# Altium PCB BUCK_PCB.PcbDoc
Units mil, origin at the board's own origin, x right, y up, seen from the top; angles counter-clockwise.
Board outline 1950 x 1909.87 mil, 2 copper layers (Top Layer, Bottom Layer); 12 components, 6 nets, 34 pads, 0 vias.
Unrouted connection lines stored in the file: 2.
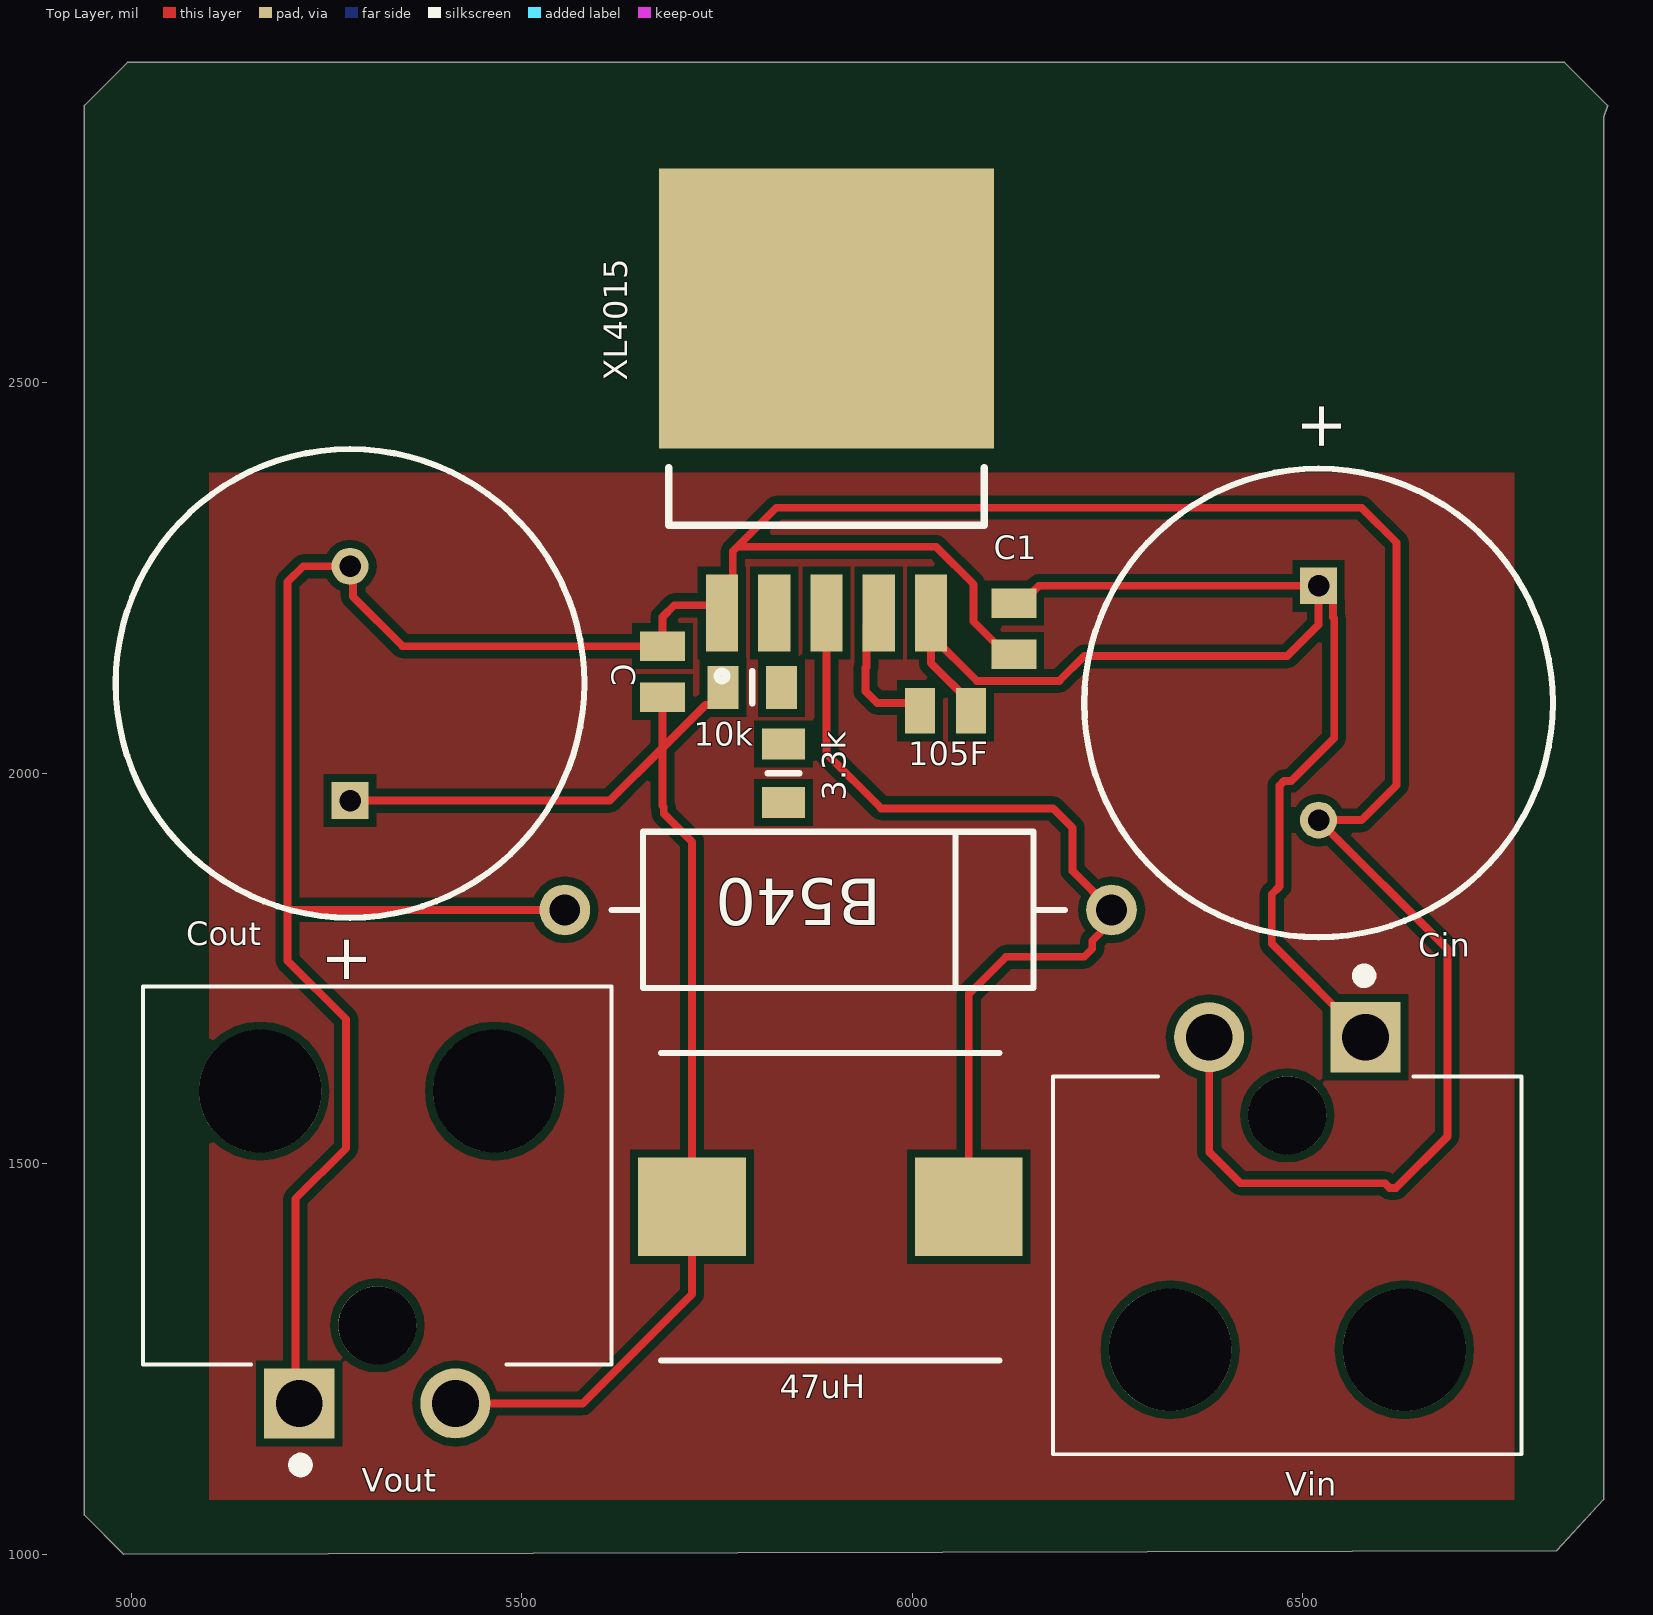
[diagram p0: Top Layer view]
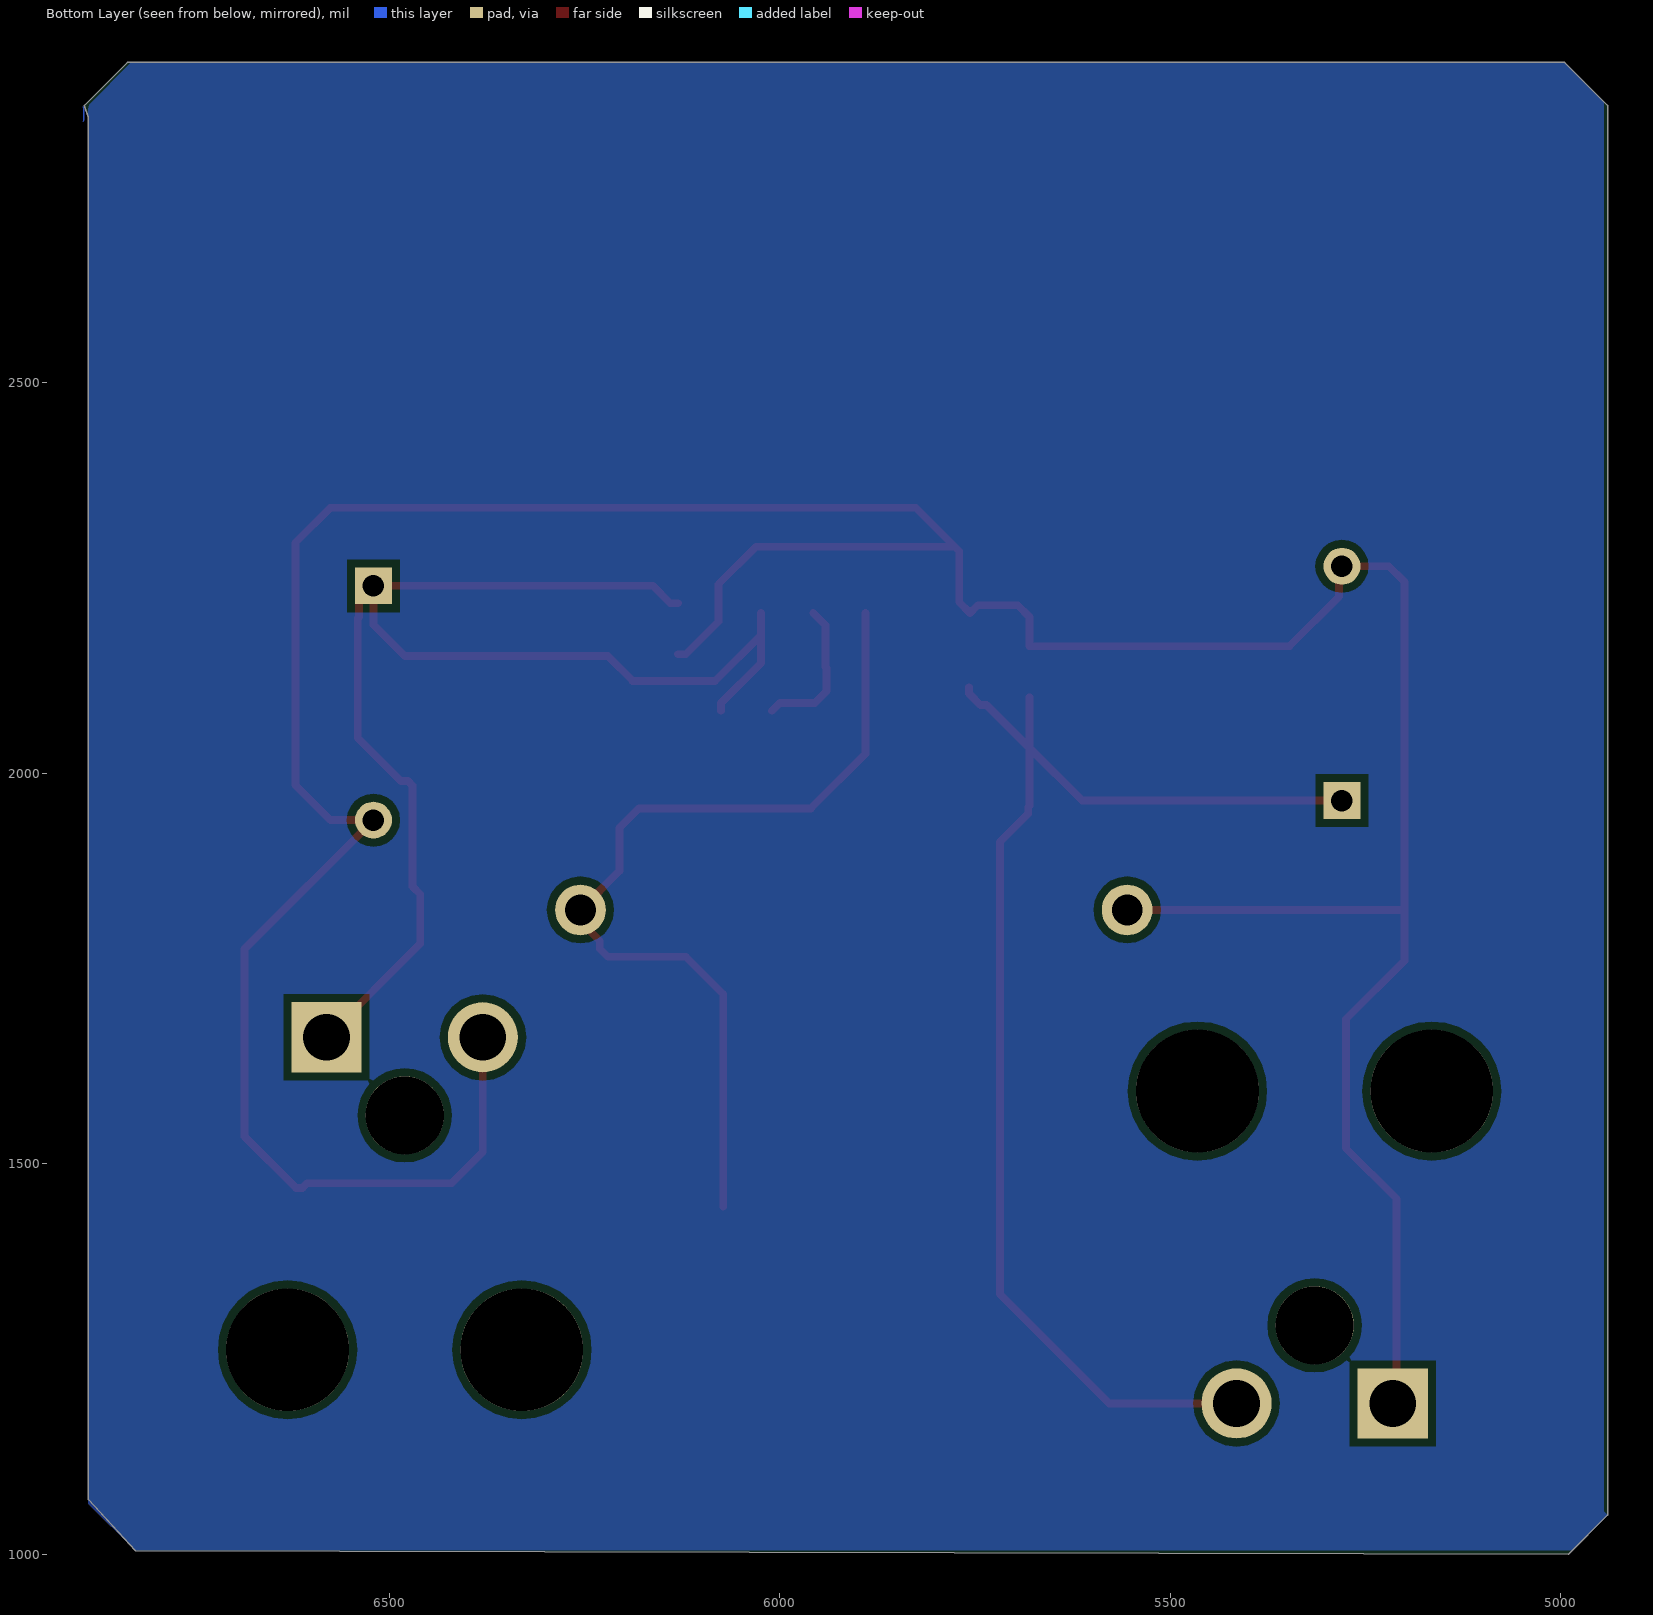
[diagram p1: Bottom Layer view, seen from below]
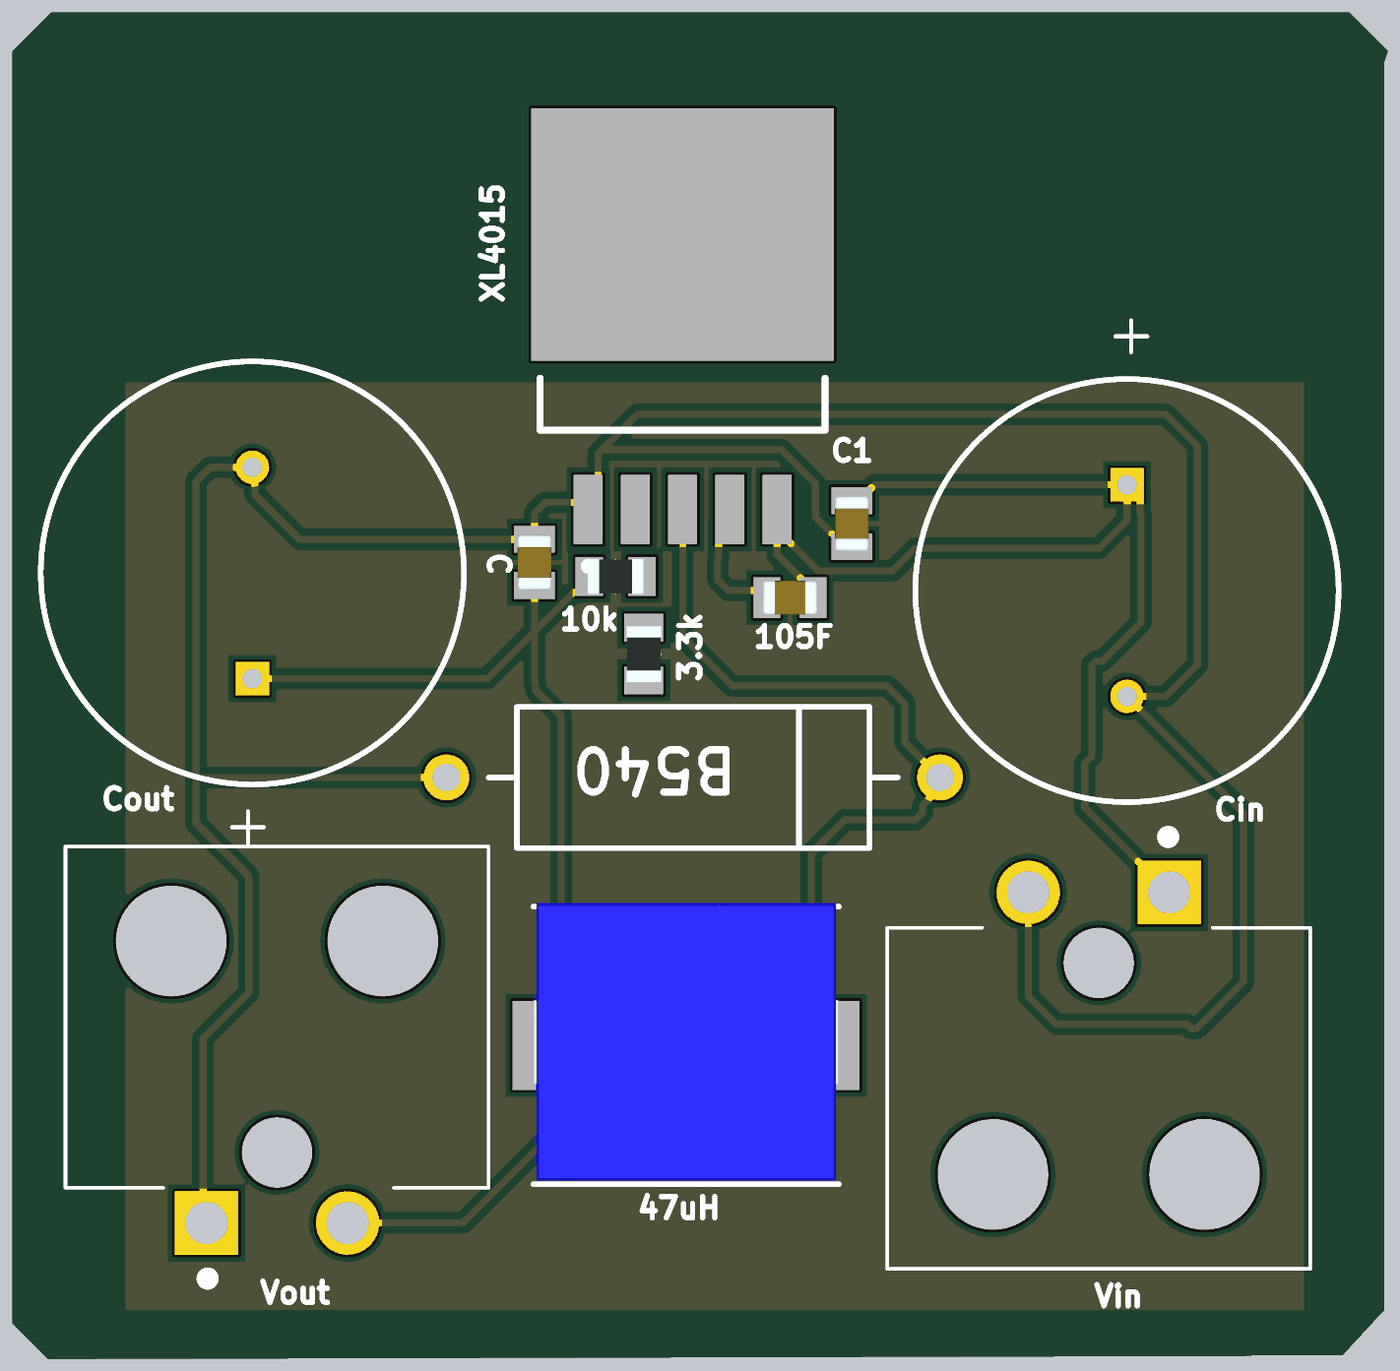
[diagram p2: 3D render of the assembled board from above, using the file's embedded part models]

## Layer stack, top to bottom
Top Solder: solder mask 0.4, Solder Resist, Dk 3.5
Top Layer: signal copper 1.4
Dielectric 1: dielectric 12.6, FR-4, Dk 4.8
Bottom Layer: signal copper 1.4
Bottom Solder: solder mask 0.4, Solder Resist, Dk 3.5

## Board outline
4990,1000.13 4940,1050.13 4940,1060 4940,2850 4940,2855 4995,2910 6835,2910 6890,2855 6885,2840 6885,1070 6825.01,1004.85

## Design rules (kind name [scope] priority, off if disabled: settings)
Clearance [All] p1: gap=10 ignorepadtopadclearanceinfootprint=FALSE except(0: Arc-Hole Track-Hole SMDPad-Hole THPad-Hole Via-Hole Fill-Hole Poly-Hole Region-Hole Text-Hole)
PolygonConnect [All] p1: connectstyle=Relief reliefconductorwidth=10 reliefentries=4 polygonreliefangle="90 Angle" airgapwidth=10
RoomDefinition BUCK_shematics [InComponentClass('BUCK_shematics')] p1: confinementstyle=ConfineIn formatcopy=TRUE lockcomponents=FALSE outline 0,0 2000,0 2000,1000 0,1000
RoutingVias [All] p1: holewidth=28 width=50 viastyle="Through Hole" minholewidth=28 minwidth=50 maxholewidth=28 maxwidth=50
SolderMaskExpansion [All] p1: expansion=4 istentingtop=FALSE
Width [All] p1: maxlimit=10 minlimit=10 preferedwidth=10
30 further rules are at their usual default settings.

## Components (designator, comment, footprint, x,y, rotation, side; value= is the part's Value field where it differs from the comment)
3.3k "" RESC2012X65N#1 5835,2000 r90 top
10k "" RESC2012X65N#2 5795,2110 r180 top
47uH "L1" INDPM110100X400N 5895,1445 r180 top
105F "CC" CAPC2012X145N 6042.32,2080 r0 top
B540 "D Zener" DIODE-0.7 5905,1825 r0 top
C "105F" CAPC2012X145N 5680,2130 r270 top
C1 "105F" CAPC2012X145N 6130,2185 r90 top
Cin "200uF" RB7.6-15 6520,2090 r90 top
Cout "Cin" RB7.6-15 5280,2115 r270 top (schematic designator C?)
Vin "" TE_794120-1 6480,1370 r180 top
Vout "794120-1" TE_794120-1 5315,1485 r0 top
XL4015 "" TO-263-5 5890,2677.68 r0 top

## Footprints (in the part's own frame and the unit in brackets; to place one, negate y for a bottom-side part, rotate by r counter-clockwise, add the part's x,y. Pads: shape width x height; smd on the part's side, far side on the other; paste and mask are expansions set on the pad)
CAPC2012X145N [mm]
  rect 0.97x1.47 smd: 1(-0.83,0) 2(0.83,0)
  body extent -1,-0.63 1,0.62, height 1.45
DIODE-0.7 [mm] "Diode, Thru-Hole; 2 Leads; 0.7 in Pin Spacing"
  round 1.65 hole 1: 1(-8.89,0) 2(8.89,0)
  silkscreen extent -7.37,-2.54 7.37,2.54
INDPM110100X400N [mm]
  rect 3.5x3.2 smd: 1(-4.5,0) 2(4.5,0)
  silkscreen extent -5.5,-5 5.5,5, body extent -5.5,-5.13 5.5,4.87, height 4
RB7.6-15 [mm] "Polarized Capacitor (Radial); 2 Leads"
  rect 1.2x1.2 hole 0.7: 1(3.81,0)
  round 1.2 hole 0.7: 2(-3.81,0)
  silkscreen extent -7.62,-7.62 7.62,7.62
RESC2012X65N#1 [mm]
  rect 1x1.4 smd: 2(0.95,0) H(-0.95,0)
  silkscreen extent 0,-0.53 0,0.53, body extent -1,-0.62 1,0.62, height 0.65
RESC2012X65N#2 [mm]
  rect 1x1.4 smd: 1(-0.95,0) 2(0.95,0)
  silkscreen extent 0,-0.53 0,0.53, body extent -1,-0.62 1,0.62, height 0.65
TE_794120-1 [mm]
  rect 2.28x2.28 hole 1.52: 1(-2.54,-7.415)
  round 2.28 hole 1.52: 2(2.54,-7.415)
  round 3.99 hole 3.99 unplated: ""(-3.81,2.745) ""(3.81,2.745)
  round 2.54 hole 2.54 unplated: ""(0,-4.875)
  silkscreen extent -7.62,-9.61 7.62,6.14
TO-263-5 [mm]
  rect 1.05x2.5 smd: 1(-3.4,-12) 2(-1.7,-12) 3(0,-12) 4(1.7,-12) 5(3.4,-12)
  rect 10.9x9.1 smd: 6(0,-2.1)
  silkscreen extent -5.13,-14.19 5.13,-7.28

## Part data
3.3k 10k: library part KTR10EZPF5103, "Thick Film Resistors - SMD 0805 510Kohm 1% High VoltageAEC-Q200", Manufacturer_Name="ROHM Semiconductor", Arrow Part Number=KTR10EZPF5103, Arrow Price/Stock=https://www.arrow.com/en/products/ktr10ezpf5103/rohm-semiconductor, Datasheet Link=http://rohmfs.rohm.com/en/products/databook/datasheet/passive/resistor/chip_resistor/ktr.pdf, Geometry.Height=0.65mm, Manufacturer_Part_Number=KTR10EZPF5103
47uH: library part SRP1038A-470M, "Inductor SMD shielded AEC-Q200 47uH Bourns SRP1038A Series Shielded Wire-wound SMD Inductor with a Carbonyl Powder Core, 47 H 20% 3A Idc", Manufacturer_Name=Bourns, RS Part Number=1728637, Allied Price/Stock=https://www.alliedelec.com/bourns-srp1038a-470m/70377524/, Allied_Number=70377524, Arrow Part Number=SRP1038A-470M, Arrow Price/Stock=https://www.arrow.com/en/products/srp1038a-470m/bourns, Datasheet Link=http://uk.rs-online.com/web/p/products/8193337, Geometry.Height=4mm, Manufacturer_Part_Number=SRP1038A-470M, RS Price/Stock=http://uk.rs-online.com/web/p/products/1728637
105F C C1: library part GRM21BR71H104JA01L, "Multilayer Ceramic Capacitors MLCC - SMD/SMT 0805 0.1uF 50volts X7R 5%", Manufacturer_Name="Murata Electronics", Arrow Part Number=GRM21BR71H104JA01L, Arrow Price/Stock=https://www.arrow.com/en/products/grm21br71h104ja01l/murata-manufacturing, Datasheet Link=http://www.murata.com/~/media/webrenewal/support/library/catalog/products/capacitor/mlcc/c02e.pdf, Geometry.Height=1.45mm, Manufacturer_Part_Number=GRM21BR71H104JA01L
B540: "Zener Diode", LatestRevisionDate=17-Jul-2002, LatestRevisionNote="Re-released for DXP Platform.", PackageDescription="Diode, Thru-Hole; 2 Leads; 0.7 in Pin Spacing", PackageReference=DIODE-0.7, Published=8-Jun-2000, Publisher="Altium Limited"
Cin Cout: library part "Cap Pol1", "Polarized Capacitor (Radial)", LatestRevisionDate=17-Jul-2002, LatestRevisionNote="Re-released for DXP Platform.", PackageDescription="Polarized Capacitor (Radial); 2 Leads", PackageReference=RB7.6-15, Published=8-Jun-2000, Publisher="Altium Limited"
  Cin: Cin=220pF
  Cout: Cout=300pF
Vin: library part 794120-1, "Conn Power HDR 2 POS 5.08mm Solder RA Thru-Hole 2 Terminal 1 Port Automotive Bag", Package=None, Availability=Unavailable, MF="TE Connectivity", MP=794120-1, Price=None, SnapEDA_Link=https://www.snapeda.com/parts/794120-1/TE%20Connectivity%20AMP%20Connectors/view-part/2777094/?ref=snap
Vout: "Conn Power HDR 2 POS 5.08mm Solder RA Thru-Hole 2 Terminal 1 Port Automotive Bag", Package=None, Availability=Unavailable, MF="TE Connectivity", MP=794120-1, Price=None, SnapEDA_Link=https://www.snapeda.com/parts/794120-1/TE%20Connectivity%20AMP%20Connectors/view-part/2777094/?ref=snap
XL4015: library part AP1506-50K5G-13, "DC / DC converters in the housing TO263-5L, Voltage Regulator, Buck Converter, Switching Regulator", Manufacturer_Name="Diodes Inc.", Arrow Part Number=AP1506-50K5G-13, Arrow Price/Stock=https://www.arrow.com/en/products/ap1506-50k5g-13/diodes-incorporated, Datasheet Link=https://www.diodes.com/assets/Datasheets/AP1506.pdf, Manufacturer_Part_Number=AP1506-50K5G-13

## Nets (pads, with @x,y where several pads share a name; then routed paths per layer and width w, separated by ;. In a path a pad name is that pad's centre, name@x,y a point inside that pad or via, vN(x,y) a via of type N, cw(c..) or ccw(c..) an arc to the next point about the centre after c; other vN are vias at no path point)
GND: B540.1 C1.1 C.1 Cin.2 Cout.2 Vin.2 Vout.1 XL4015.1 | length 4957.6
  Top Layer w10: Vout.1 5210,1198.07 5210,1455 5275,1520 5275,1685 5200,1760 5200,1825 ; B540.1 5200,1825 ; C1.1 6120.16,2152.32 6078.4,2194.08 6078.4,2241.79 6030.19,2290 5775.86,2290 ; Vin.2 6380,1515 6420,1475 6605,1475 6610.86,1469.14 6619.14,1469.14 6685,1535 6685,1775 Cin.2 6575,1940 6620,1985 6620,2295 6575,2340 5825.86,2340 5775.86,2290 ; 5200,1825 5200,2245 5220,2265 Cout.2 5283.62,2261.38 5283.62,2226.38 5347.32,2162.68 C.1 5680,2200 5695,2215 5746.38,2215 XL4015.1 5770,2219.09 5770,2284.14 5775.86,2290
Net3.3k_2: 3.3k.2 10k.1 XL4015.2
Net10k_2: 10k.2 47uH.2 C.2 Cout.1 Vout.2 | length 1683.2
  Top Layer w10: Cout.1 5612.6,1965 5680,2032.4 ; Vout.2 5578.07,1193.07 5717.83,1332.83 47uH.2 5717.83,1912.17 5681.64,1948.36 5681.64,1956.64 5680,1958.28 5680,2032.4 ; C.2 5680,2032.4 ; 10k.2 5757.6,2102.13 5742.91,2087.44 5735.04,2087.44 5680,2032.4
Net47uH_1: 47uH.1 B540.2 XL4015.3 | length 1174.6
  Top Layer w10: XL4015.3 5890,2025 5960,1955 6180,1955 6205,1930 6205,1875 B540.2 6255,1810.13 6230.34,1785.47 6230.34,1775.34 6220,1765 6120,1765 6072.17,1717.17 47uH.1
Net105F_1: 105F.1 XL4015.4 | length 187.2
  Top Layer w10: XL4015.4 5941.26,2189.57 5941.26,2136.14 5940,2134.88 5940,2105 5955,2090 5999.65,2090 105F.1
Net105F_2: 105F.2 C1.2 Cin.1 Vin.1 XL4015.5 | length 1820.3
  Top Layer w10: XL4015.5 XL4015.5@6023.86,2176.69 ; 105F.2 6075,2089.84 6023.86,2140.98 XL4015.5@6023.86,2176.69 ; C1.2 6139.84,2217.68 6162.17,2240 Cin.1 ; Vin.1 6460,1781.93 6460,1845 6470,1855 6470,1984.14 6475.86,1990 6485,1990 6540,2045 6540,2198.28 6538.62,2199.66 6538.62,2221.38 Cin.1 ; XL4015.5@6023.86,2176.69 6082.32,2118.23 6188.23,2118.23 6220,2150 6480,2150 6520,2190 Cin.1
pads on no net: 3.3k.H Vin. Vout. XL4015.6

## Polygon pours and split planes (outlines as drawn)
no net on Top Layer "NONET_L01_P008" (solid, pour order 8): 6770.82,2385 5100,2385 5100,1070 6770.82,1070
no net on Top Layer "NONET_L01_P007" (solid, pour order 7): 5945,2410
no net on Bottom Layer "NONET_L02_P011" (solid, pour order 11): 6890,2855
no net on Bottom Layer "NONET_L02_P010" (solid, pour order 10): 6891.83,2853.17 6891.83,2834.66 6890,2836.49 6890,2850
no net on Bottom Layer "NONET_L02_P009" (solid, pour order 9): 6890,2850 6830,2910 4995,2910 4945,2860 4945,1055 4940,1050 4985,1005 6825,1005 6885,1065 6885,2850 6890,2855 6891.83,2853.17 6891.83,2834.66
no net on Layer0 "Default Coverlay 2 Top" (split plane): 1000,1000 7000,1000 7000,5000 1000,5000
no net on Layer0 "Default Coverlay 2 Bottom" (split plane): 1000,1000 7000,1000 7000,5000 1000,5000

## Text inside footprints (layer, text, board x,y; h text height)
Cin: Top Overlay "+" at 6549.01,2410.15 h59.06 r90
Cout: Top Overlay "+" at 5250.99,1794.85 h59.06 r270